# Altium PCB Power Amp.PcbDoc
Units mm, origin at the board's own origin, x right, y up, seen from the top; angles counter-clockwise.
Board outline 50 x 50 mm, 2 copper layers (Top Layer, Bottom Layer), stack 1.671 mm thick; 39 components, 20 nets, 99 pads, 28 vias.
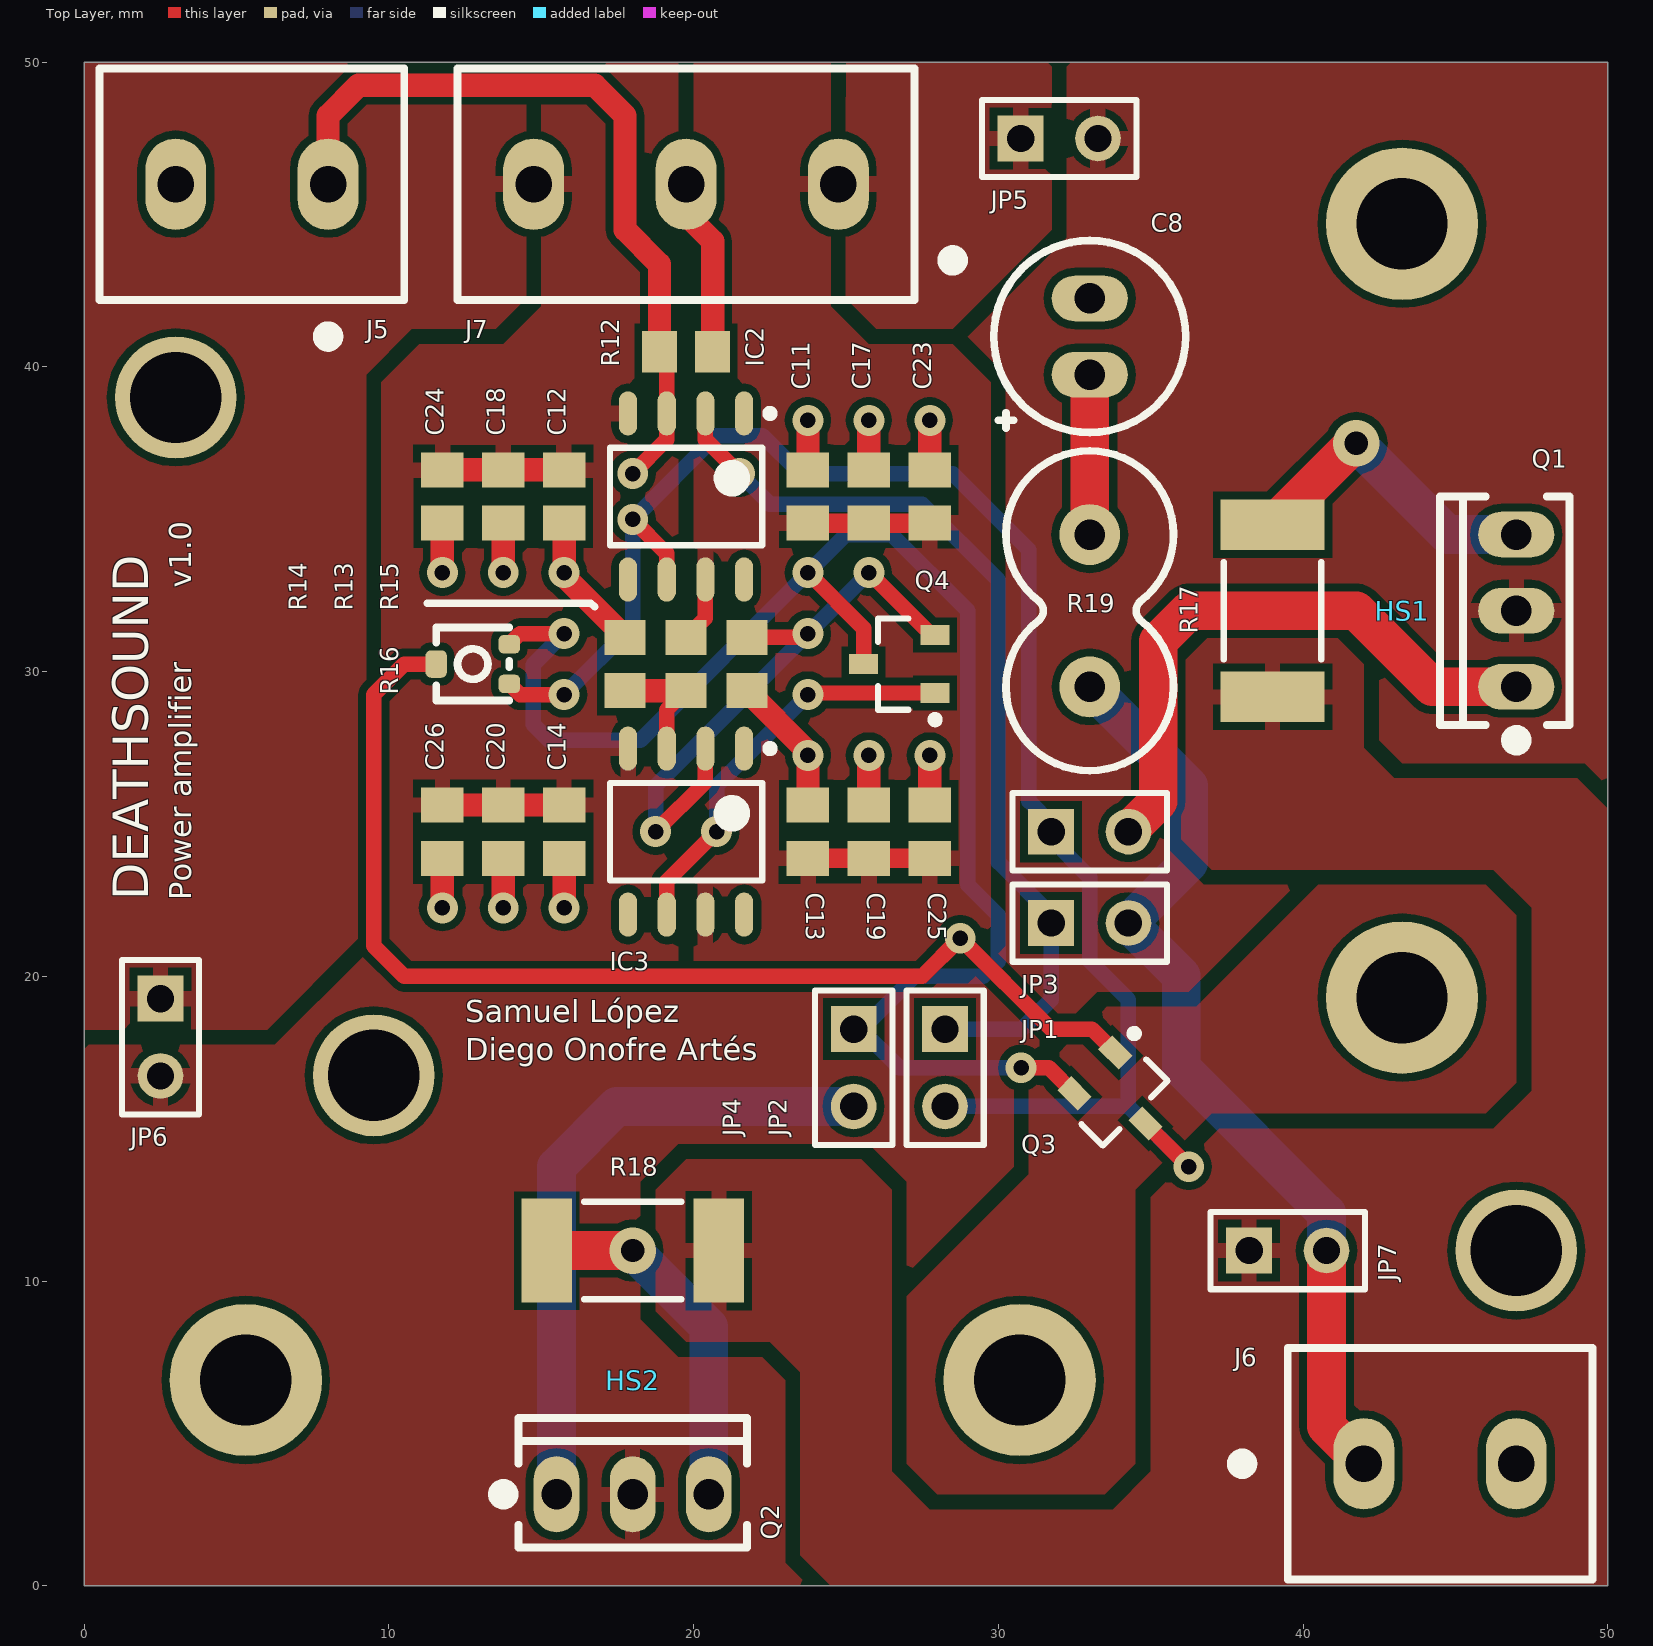
[diagram p0: Top Layer view]
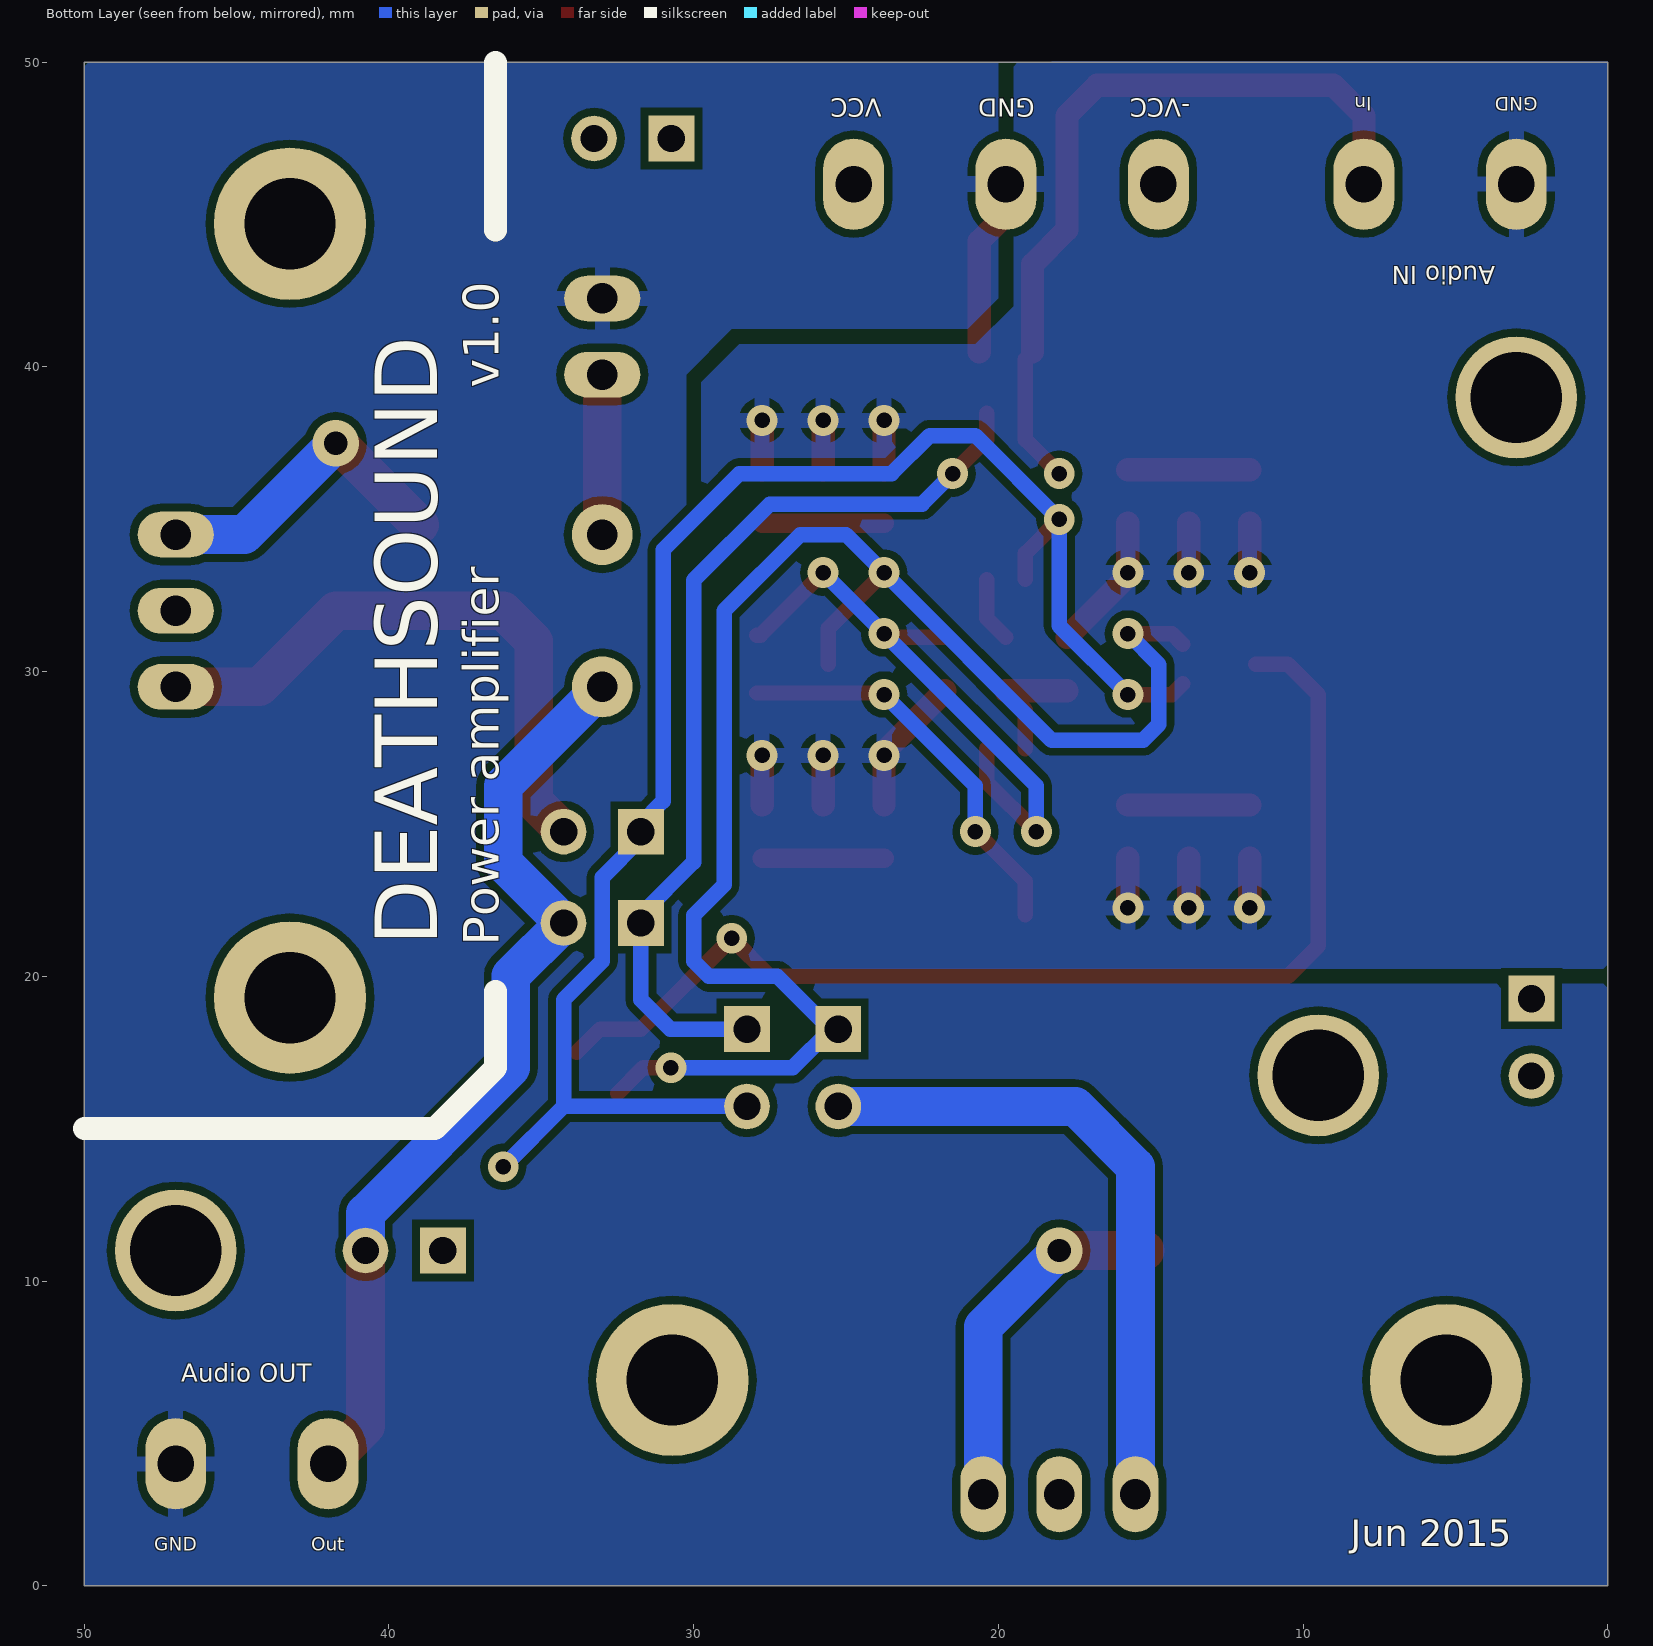
[diagram p1: Bottom Layer view, seen from below]

## Layer stack, top to bottom
Top Solder: solder mask 0.0102, Solder Resist, Dk 3.5
Top Layer: signal copper 0.0356
Dielectric 1: dielectric 1.6, FR-4, Dk 4.8
Bottom Layer: signal copper 0.0356
Bottom Solder: solder mask 0.0102, Solder Resist, Dk 3.5

## Board outline
0,0 0,50 50,50 50,0

## Design rules (kind name [scope] priority, off if disabled: settings)
Clearance ClearanceSignal [(InComponentClass('Signal') AND InPolygon)] p1: gap=0.254
Clearance [All] p2: gap=0.254
ComponentClearance ComponentClearanceHS [HasFootprint('MC33289') vs HasFootprint('TO-220')] p1: gap=0 collisioncheckmode=3 verticalgap=0 showdistances=FALSE
ComponentClearance [All] p2: gap=0.254 collisioncheckmode=3 verticalgap=0.254 showdistances=FALSE
Height [All] p1: minheight=0 maxheight=50 prefheight=12.7
HoleSize [All] p1: absolutevalues=TRUE maxlimit=5 minlimit=0.025 maxpercent=80.000 minpercent=20.000
PlaneClearance PlaneClearanceSignal [InComponentClass('Signal')] p1: clearance=0.508
PlaneClearance [All] p2: clearance=0.762
PolygonConnect [All] p1: connectstyle=Relief reliefconductorwidth=0.508 reliefentries=4 polygonreliefangle="90 Angle" airgapwidth=0.254
RoomDefinition Signal [InComponentClass('Room Definition 1')] p1: confinementstyle=ConfineIn formatcopy=TRUE lockcomponents=FALSE outline 9.75,20.25 29.75,20.25 29.75,40.25 9.75,40.25
RoomDefinition "Power Amp" [InComponentClass('Power Amp')] p2: confinementstyle=ConfineIn formatcopy=TRUE lockcomponents=FALSE outline 0,0 50,0 50,50 0,50
RoutingVias [All] p1: holewidth=0.508 width=1.016 viastyle="Through Hole" minholewidth=0.508 minwidth=0.762 maxholewidth=1.27 maxwidth=2.032
SilkToSolderMaskClearance SilkToSolderMaskClearanceR16 [InComponent('R16')] p1: minsilkscreentomaskgap=0.1 clearancetoexposedcopper=TRUE
SilkToSolderMaskClearance [IsPad] p2: minsilkscreentomaskgap=0.254 clearancetoexposedcopper=TRUE
SolderMaskExpansion [All] p1: expansion=0.102
Width [All] p1: maxlimit=2.54 minlimit=0.254 preferedwidth=0.508
25 further rules are at their usual default settings.

## Classes and differential pairs
component class Signal: C11 C12 C13 C14 C17 C18 C19 C20 C23 C24 C25 C26 IC2 IC3 Q4 R13 R14 R15 R16

## Components (designator, comment, footprint, x,y, rotation, side; value= is the part's Value field where it differs from the comment)
C8 "68u" CRADIAL-2.5MM 33,41 r90 top
C11 "100p" C0805 23.75,35.75 r270 top
C12 "100p" C0805 15.75,35.75 r270 top
C13 "100p" C0805 23.75,24.75 r270 top
C14 "100p" C0805 15.75,24.75 r270 top
C17 "10n" C0805 25.75,35.75 r270 top
C18 "10n" C0805 13.75,35.75 r270 top
C19 "10n" C0805 25.75,24.75 r270 top
C20 "10n" C0805 13.75,24.75 r270 top
C23 "1u" C0805 27.75,35.75 r270 top
C24 "1u" C0805 11.75,35.75 r270 top
C25 "1u" C0805 27.75,24.75 r270 top
C26 "1u" C0805 11.75,24.75 r270 top
HS1 "Heatsink" MC33289 43.25,32 r90 top
HS2 "Heatsink" MC33289 18,6.75 r0 top
IC2 "LF356" SOIC127P600X175-8N 19.75,35.75 r270 top
IC3 "TL081" SOIC127P600X175-8N 19.75,24.75 r270 top
J5 "Audio In" "2 PIN 5MM TERMINAL BLOCK" 5.5,46 r180 top
J6 "Speaker" "2 PIN 5MM TERMINAL BLOCK" 44.5,4 r0 top
J7 "Power Supply" "3 PIN 5MM TERMINAL BLOCK" 19.75,46 r180 top
JP1 "Load feedback" HDR1X2 33,21.75 r0 top
JP2 "VBE calib" HDR1X2 28.25,17 r270 top
JP3 "NPN conn" HDR1X2 33,24.75 r0 top
JP4 "PNP conn" HDR1X2 25.25,17 r270 top
JP5 "NPN current" HDR1X2 32,47.5 r0 top
JP6 "PNP current" HDR1X2 2.5,18 r270 top
JP7 "Load conn" HDR1X2 39.5,11 r0 top
Q1 "TIP120" TO-220 47,32 r90 top
Q2 "TIP125" TO-220 18,3 r0 top
Q3 "MMBT3904-7-F" SOT95P240X110-3N 34,16 r315 top
Q4 "MMBT3904-7-F" SOT95P240X110-3N 26.75,30.25 r180 top
R12 "100K" R0805 19.75,40.5 r0 top
R13 "20K" R0805 19.75,30.25 r90 top
R14 "330" R0805 17.75,30.25 r270 top
R15 "100" R0805 21.75,30.25 r90 top
R16 "10K" "RES POT SQUARE TRIMM" 12.75,30.25 r90 top
R17 "0.05" R2512 39,32 r90 top
R18 "0.05" R2512 18,11 r0 top
R19 "3.9" RAXIAL-5MM-1MM 33,32 r270 top

## Footprints (in the part's own frame and the unit in brackets; to place one, negate y for a bottom-side part, rotate by r counter-clockwise, add the part's x,y. Pads: shape width x height; smd on the part's side, far side on the other; paste and mask are expansions set on the pad)
"2 PIN 5MM TERMINAL BLOCK" [mm]
  oval 2x3 hole 1.2: 1(-2.5,0) 2(2.5,0)
  silkscreen extent -5,-3.8 5,5.25, body extent -5,-3.8 5,3.8, height 10
"3 PIN 5MM TERMINAL BLOCK" [mm]
  oval 2x3 hole 1.2: 1(-5,0) 2(0,0) 3(5,0)
  silkscreen extent -9,-3.8 7.5,3.8, body extent -7.5,-3.8 7.5,3.8, height 10
C0805 [mm] "Chip Capacitor, 2-Leads, Body 2,00x1,25mm, IPC Medium Density"
  rect 1.15x1.4 smd: 1(-0.875,0) 2(0.875,0)
  body extent -1.1,-0.67 1.1,0.67, height 0.7
CRADIAL-2.5MM [mm]
  oval 1.5x2.5 hole 1: 1(-1.25,0) 2(1.25,0)
  silkscreen extent -3.15,-3.15 3.15,3.15, body extent -3.14,-3.15 3.15,3.15, height 12
HDR1X2 [mm] "Connector; Header; 2 Position"
  rect 1.5x1.5 hole 0.9: 1(-1.27,0)
  round 1.5 hole 0.9: 2(1.27,0)
  silkscreen extent -2.54,-1.27 2.54,1.27, body extent -2.52,-1.25 2.52,1.25, height 8.5
MC33289 [mm]
  round 5 hole 3: ""(-12.7,0) ""(12.7,0)
  body extent -17.2,-6 17.2,6.5, height 38
R0805 [mm] "Chip Resistor, 2-Leads, Body 2,00x1,25mm, IPC Medium Density"
  rect 1.15x1.35 smd: 1(-0.875,0) 2(0.875,0)
  body extent -1.1,-0.67 1.1,0.67, height 0.7
R2512 [mm] "Chip Resistor, 2-Leads, Body 6,40x3,20mm, IPC Medium Density"
  rect 1.65x3.4 smd: 1(-2.825,0) 2(2.825,0)
  silkscreen extent -1.6,-1.6 1.6,1.6, body extent -3.3,-1.7 3.3,1.7, height 0.9
RAXIAL-5MM-1MM [mm] "Axial 3W resistor"
  round 2 hole 1: 1(-2.5,0) 2(2.5,0)
  silkscreen extent -5.25,-2.75 5.25,2.75, body extent -5.24,-2.75 2.8,2.75, height 19
"RES POT SQUARE TRIMM" [mm]
  rrect50% 0.6x0.7 smd: 1(-0.65,-1.2) 3(0.65,-1.2)
  rrect50% 0.9x0.7 smd: 2(0,1.2)
  silkscreen extent -1.2,-1.2 1.2,1.2, body extent -1.2,-1.2 1.2,1.2, height 1.25
SOIC127P600X175-8N [mm] "SOIC, 8-Leads, Body 4,90x3,90mm, Pitch 1,27mm, IPC Medium Density"
  oval 1.45x0.6 smd: 1(-2.725,1.905) 2(-2.725,0.635) 3(-2.725,-0.635) 4(-2.725,-1.905) 5(2.725,-1.905) 6(2.725,-0.635) 7(2.725,0.635) 8(2.725,1.905)
  silkscreen extent -2.85,-2.5 1.6,2.88, body extent -2,-2.5 2,2.5, height 1.75
SOT95P240X110-3N [mm] "SOT23, 3-Leads, Body 2,90x2,40mm, Pitch 0,95mm, IPC Medium Density"
  rect 0.95x0.65 smd: 1(-1.175,0.95) 2(-1.175,-0.95) 3(1.175,0)
  silkscreen extent -1.3,-1.5 0.7,1.95, body extent -0.7,-1.5 0.7,1.5, height 1.1
TO-220 [mm]
  oval 1.5x2.5 hole 1: 1(-2.5,0) 2(0,0) 3(2.5,0)
  silkscreen extent -4.5,-1.75 3.75,2.5, body extent -5,-1.75 5,2.5, height 23.2

## Part data
C8: library part "Pol Capacitor", "Polarized Capacitor"
C11 C12 C13 C14 C17 C18 C19 C20 C23 C24 C25 C26: library part Capacitor, "Capacitor"
HS1: library part "Heatsink (MC33289)", "Q1 Heatsink"
HS2: library part "Heatsink (MC33289)", "Q2 Heatsink"
J5 J6: library part "Terminal Block 2 Pin", "Terminal Block, 2 Pin"
J7: library part "Terminal Block 3 Pin", "Terminal Block, 3 Pin"
JP1 JP2 JP3 JP4 JP5 JP6 JP7: library part "Header 2", "Header, 2-Pin"
Q1: library part TIP120/121/122, "NPN Darlington Bipolar Transistor"
Q2: library part TIP125/126/127, "PNP Darlington Bipolar Transistor"
Q3 Q4: "NPN General Purpose Amplifier SMD"
R12 R13 R14 R15 R17 R18 R19: library part Resistor, "Resistor"
R16: library part "Res Pot", "Square Trimming Potentiometer"

## Free pads (board coordinates)
  round 4 hole 3: ""(3,39) ""(9.5,16.75) ""(47,11)

## Via types
v1: diameter 1.016, hole 0.508, Top Layer to Bottom Layer, 26 vias
v2: diameter 1.524, hole 0.762, Top Layer to Bottom Layer, 2 vias

## Nets (pads, with @x,y where several pads share a name; then routed paths per layer and width w, separated by ;. In a path a pad name is that pad's centre, name@x,y a point inside that pad or via, vN(x,y) a via of type N, cw(c..) or ccw(c..) an arc to the next point about the centre after c; other vN are vias at no path point)
-VCC: C12.1 C14.1 C18.1 C20.1 C24.1 C26.1 IC2.4 IC3.4 J7.3 JP6.1 | length 8
  Top Layer w0.762: C26.1 C20.1 C14.1 ; C24.1 C18.1 C12.1
GND: C8.2 C11.1 C12.2 C13.1 C14.2 C17.1 C18.2 C19.1 C20.2 C23.1 C24.2 C25.1 C26.2 J5.2 J6.2 J7.2 R12.2 R14.1 R15.1 | length 31
  Top Layer w0.762: v1(11.75,22.25) C26.2 ; v1(11.75,33.25) C24.2 ; v1(13.75,22.25) C20.2 ; v1(13.75,33.25) C18.2 ; v1(15.75,22.25) C14.2 ; v1@15.75,33.125 R14.1 ; v1(15.75,33.25) C12.2 ; J7.2 19.75,45 20.625,44.125 R12.2 ; R15.1 v1@23.75,27.375 ; C13.1 v1(23.75,27.25) ; C11.1 v1(23.75,38.25) ; C19.1 v1(25.75,27.25) ; C17.1 v1(25.75,38.25) ; C25.1 v1(27.75,27.25) ; C23.1 v1(27.75,38.25)
NetC8_1: C8.1 R19.1 | length 5.2
  Top Layer w1.27: R19.1 C8.1
NetIC2_2: IC2.2 JP1.1 JP2.1 | length 30.8
  Top Layer w0.508: IC2.2 20.385,37.615 v1(21.5,36.5)
  Bottom Layer w0.508: v1(21.5,36.5) 22.5,35.5 27.5,35.5 30,33 30,23.75 31.73,22.02 JP1.1 31.73,19.23 30.77,18.27 JP2.1
NetIC2_3: IC2.3 J5.1 R12.1 | length 25.6
  Top Layer w0.508: v1(18,36.5) 19.115,37.615 IC2.3 19.115,40.26 R12.1
  Top Layer w0.762: J5.1 8,48.25 9,49.25 16.75,49.25 17.75,48.25 17.75,44.5 18.875,43.375 R12.1
NetIC2_6: IC2.6 JP2.2 JP3.1 Q3.3 R16.1 | length 57.2
  Top Layer w0.508: R16.1 14.3,29.25 v1(15.75,29.25) ; v1(18,35) 19.115,33.885 IC2.6 ; JP3.1@31.73,24.52 JP3.1 ; Q3.3 v1(36.25,13.75)
  Bottom Layer w0.508: v1(15.75,29.25) 18,31.5 v1(18,35) 20.75,37.75 22.25,37.75 23.5,36.5 28.5,36.5 31,34 31,25.75 31.73,25.02 JP3.1 ; JP2.2 34.27,15.73 ; JP3.1@31.73,24.52 33,23.25 33,20.5 34.27,19.23 34.27,15.73 ; v1(36.25,13.75) 34.27,15.73
NetIC3_2: IC3.2 Q4.2 R15.2 | length 19.9
  Top Layer w0.508: v1(18.75,24.75) 20.385,26.385 IC3.2 ; R15.2 23.625,31.125 v1(23.75,31.25) ; v1(25.75,33.25) 27.8,31.2 Q4.2
  Bottom Layer w0.508: v1(18.75,24.75) 18.75,26.25 v1(23.75,31.25) v1(25.75,33.25)
NetIC3_3: IC3.3 R13.1 R14.2 | length 4.2
  Top Layer w0.508: IC3.3 19.115,28.74 R13.1
  Top Layer w0.762: R14.2 R13.1
NetIC3_6: IC3.6 Q4.1 | length 13.3
  Top Layer w0.508: IC3.6 19.115,23.115 v1(20.75,24.75) ; v1(23.75,29.25) 23.8,29.3 Q4.1
  Bottom Layer w0.508: v1(20.75,24.75) 20.75,26.25 v1(23.75,29.25)
NetJ6_1: J6.1 JP1.2 JP7.2 R19.2 | length 30.9
  Top Layer w1.27: JP7.2 40.77,5.23 J6.1
  Bottom Layer w1.27: R19.2 36.25,26.25 36.25,23.73 JP1.2 36,20.02 36,17 40.77,12.23 JP7.2
NetJP3_2: JP3.2 Q1.1 | length 19.9
  Top Layer w1.27: JP3.2 34.27,24.77 35.25,25.75 35.25,31 36.25,32 41.75,32 44.25,29.5 Q1.1
NetJP4_1: JP4.1 Q3.2 Q4.3 R16.3 | length 52.9
  Top Layer w0.508: R16.3 14.3,31.25 v1(15.75,31.25) ; v1(23.75,33.25) 25.575,31.425 Q4.3 ; v1(30.75,17) 31.657,17 Q3.2
  Bottom Layer w0.508: v1(15.75,31.25) 14.734,30.234 14.734,28.266 15.25,27.75 18.25,27.75 v1(23.75,33.25) 25,34.5 26.5,34.5 29,32 29,23 30,22 30,20.5 29.5,20 27.25,20 25.52,18.27 JP4.1@25.48,18.27 ; JP4.1 JP4.1@25.48,18.27 ; v1(30.75,17) 26.75,17 JP4.1@25.48,18.27
NetJP4_2: JP4.2 Q2.1 | length 21.3
  Bottom Layer w1.27: Q2.1 15.5,13.75 17.48,15.73 JP4.2
NetQ1_3: Q1.3 R17.2 | length 10.4
  Top Layer w1.27: R17.2 41.675,37.5 v2(41.75,37.5)
  Bottom Layer w1.27: v2(41.75,37.5) 44.75,34.5 Q1.3
NetQ2_3: Q2.3 R18.1 | length 11.9
  Top Layer w1.27: R18.1 v2(18,11)
  Bottom Layer w1.27: v2(18,11) 20.5,8.5 Q2.3
NetQ3_1: Q3.1 R16.2 | length 37.5
  Top Layer w0.508: R16.2 10.5,30.25 9.5,29.25 9.5,21 10.5,20 27.5,20 v1(28.75,21.25) 31.73,18.27 33.074,18.27 Q3.1
PRE_ZOBEL: JP7.1 R17.1 R18.2
Q1_VCC: JP5.2 Q1.2
Q2_-VCC: JP6.2 Q2.2
VCC: C11.2 C13.2 C17.2 C19.2 C23.2 C25.2 IC2.7 IC3.7 J7.1 JP5.1 R13.2 | length 10.2
  Top Layer w0.508: R13.2 20.385,31.76 IC2.7
  Top Layer w0.635: C13.2 C19.2 C25.2 ; C11.2 C17.2 C23.2
pads on no net: HS1. HS2. IC2.1 IC2.5 IC2.8 IC3.1 IC3.5 IC3.8

## Polygon pours and split planes (outlines as drawn)
GND on Bottom Layer "Signal GND" (solid, pour order 13): 0,20.25 28.5,20.25 29.75,21.5 29.75,39.5 28.5,40.75 20.75,40.75 19.5,42 19.5,50 0,50
GND on Bottom Layer "Power GND" (solid, pour order 12): 20,50 20,42.25 21,41.25 28.75,41.25 30.25,39.75 30.25,21.25 28.75,19.75 0,19.75 0,0 50,0 50,50
GND on Bottom Layer "Signal GND" (solid, shelved, pour order 11): 0,50 18.25,50
Q1_VCC on Top Layer "Q1_VCC" (solid, pour order 17): 32.25,50 50,50 50,26.25 49.25,27 43.25,27 42.5,27.75 42.5,30.5 41.25,31.75 36.75,31.75 35.5,30.5 35.5,24.25 36.75,23 39.75,23 36.25,19.5 33.25,19.5 32,18.25 29.75,20.5 30.25,21 30.25,39.75 29,41 32.25,44.25
no net on Top Layer "Q3_HS" (solid, pour order 20): 31,16.5 33.5,19 36.5,19 40.5,23 46,23 47,22 47,16.5 46,15.5 37,15.5 34.5,13 34.5,4 33.5,3 28,3 27,4 27,9.5 31,13.5
-VCC on Top Layer "-VCC" (solid, pour order 16): 14.5,50 14.5,42.25 13.5,41.25 10.75,41.25 9.25,39.75 9.25,21.5 6,18.25 0,18.25 0,50
-VCC on Top Layer "-VCC" (solid, pour order 14): 19.5,50 19.5,20.25 11,20.25 9.75,21.5 9.75,39.5 11,40.75 13.75,40.75 15,42 15,50
VCC on Top Layer "VCC" (solid, pour order 15): 20,49.994 20,20.25 28.5,20.25 29.75,21.5 29.75,39.494 28.5,40.744 25.75,40.744 24.5,41.994 24.5,49.994
Q2_-VCC on Top Layer "Q2_-VCC" (solid, pour order 18): 0,17.75 0,0 23.75,0 23,0.75 23,6.75 22.25,7.5 19.5,7.5 18.25,8.75 18.25,13.25 19.5,14.5 25.75,14.5 27,13.25 27,10.25 30.5,13.75 30.5,16.75 31.75,18 29.5,20.25 29,19.75 10.75,19.75 9.5,21 6.25,17.75
VCC on Top Layer "VCC" (solid, pour order 19): 25,50 31.75,50 31.75,44.5 28.5,41.25 26,41.25 25,42.25
PRE_ZOBEL on Top Layer "Pre_zobel" (solid, pour order 27): 18.75,13 19.75,14 25.5,14 26.5,13 26.5,3.762 27.75,2.5 33.75,2.5 35,3.75 35,12.75 37.25,15 46.25,15 47.5,16.25 47.5,22.25 46.244,23.506 37.006,23.506 36.006,24.506 36,30.25 37,31.25 41,31.25 42,30.25 42,27.5 43,26.5 49,26.5 50,25.5 50,0 24.5,0 23.5,1 23.5,7 22.5,8 19.75,8 18.75,9
no net on Top Solder "Q3_HS" (solid): 33.25,15.25 34,14.5 34,13.5 33.5,13.5 32.5,14.5 33.25,15.25
no net on Top Solder "Q3_HS" (solid): 34.75,16.75 35.5,16 36.5,16 36.5,16.5 35.5,17.5 34.75,16.75

## Silkscreen, mask and mechanical layers (free items; w line width, h text height)
Top Overlay:
  lines w0.25: 11.25,32.25 16.625,32.25 16.75,32.125
  text "v1.0" at 3.75,32.746 h1.25 r90
  text "DEATHSOUND" at 2.5,22.5 h2 r90
  text "Power amplifier" at 3.75,22.5 h1.25 r90
  text "Samuel López" at 12.5,18.25 h1.25
  text "Diego Onofre Artés" at 12.5,17 h1.25
Bottom Overlay:
  lines w0.75: 36.5,19.5 36.5,17 38.5,15 50,15 ; 36.5,44.5 36.5,50
  text "GND" at 2.288,49 h0.75 r180
  text "In" at 7.748,49 h0.75 r180
  text "-VCC" at 13.705,49 h1 r180
  text "GND" at 18.8,49 h1 r180
  text "VCC" at 23.829,49 h1 r180
  text "Audio IN" at 3.698,43.5 h1 r180
  text "v1.0" at 36,39.312 h2 r270
  text "Power amplifier" at 36,21 h2 r270
  text "DEATHSOUND" at 37.75,21 h3.5 r270
  text "Audio OUT" at 46.825,6.5 h1
  text "Jun 2015" at 8.43,1 h1.5
  text "Out" at 42.559,1 h0.75
  text "GND" at 47.712,1 h0.75
Mechanical 1:
  lines w0.25: 50,0 0,0 0,50 50,50 ; 50,0 50,0 ; 50,0 50,50 ; 50,50 50,50

## Dimensions
0,50 to 50,50 on Mechanical 13
0,0 to 0,50 on Mechanical 13